# Altium PCB MiniRacer_V2.PcbDoc
Units mm, origin at the board's own origin, x right, y up, seen from the top; angles counter-clockwise.
Board outline 38.35 x 46.48 mm, 2 copper layers (Top Layer, Bottom Layer); 64 components, 63 nets, 247 pads, 101 vias.
Unrouted connection lines stored in the file: 1.
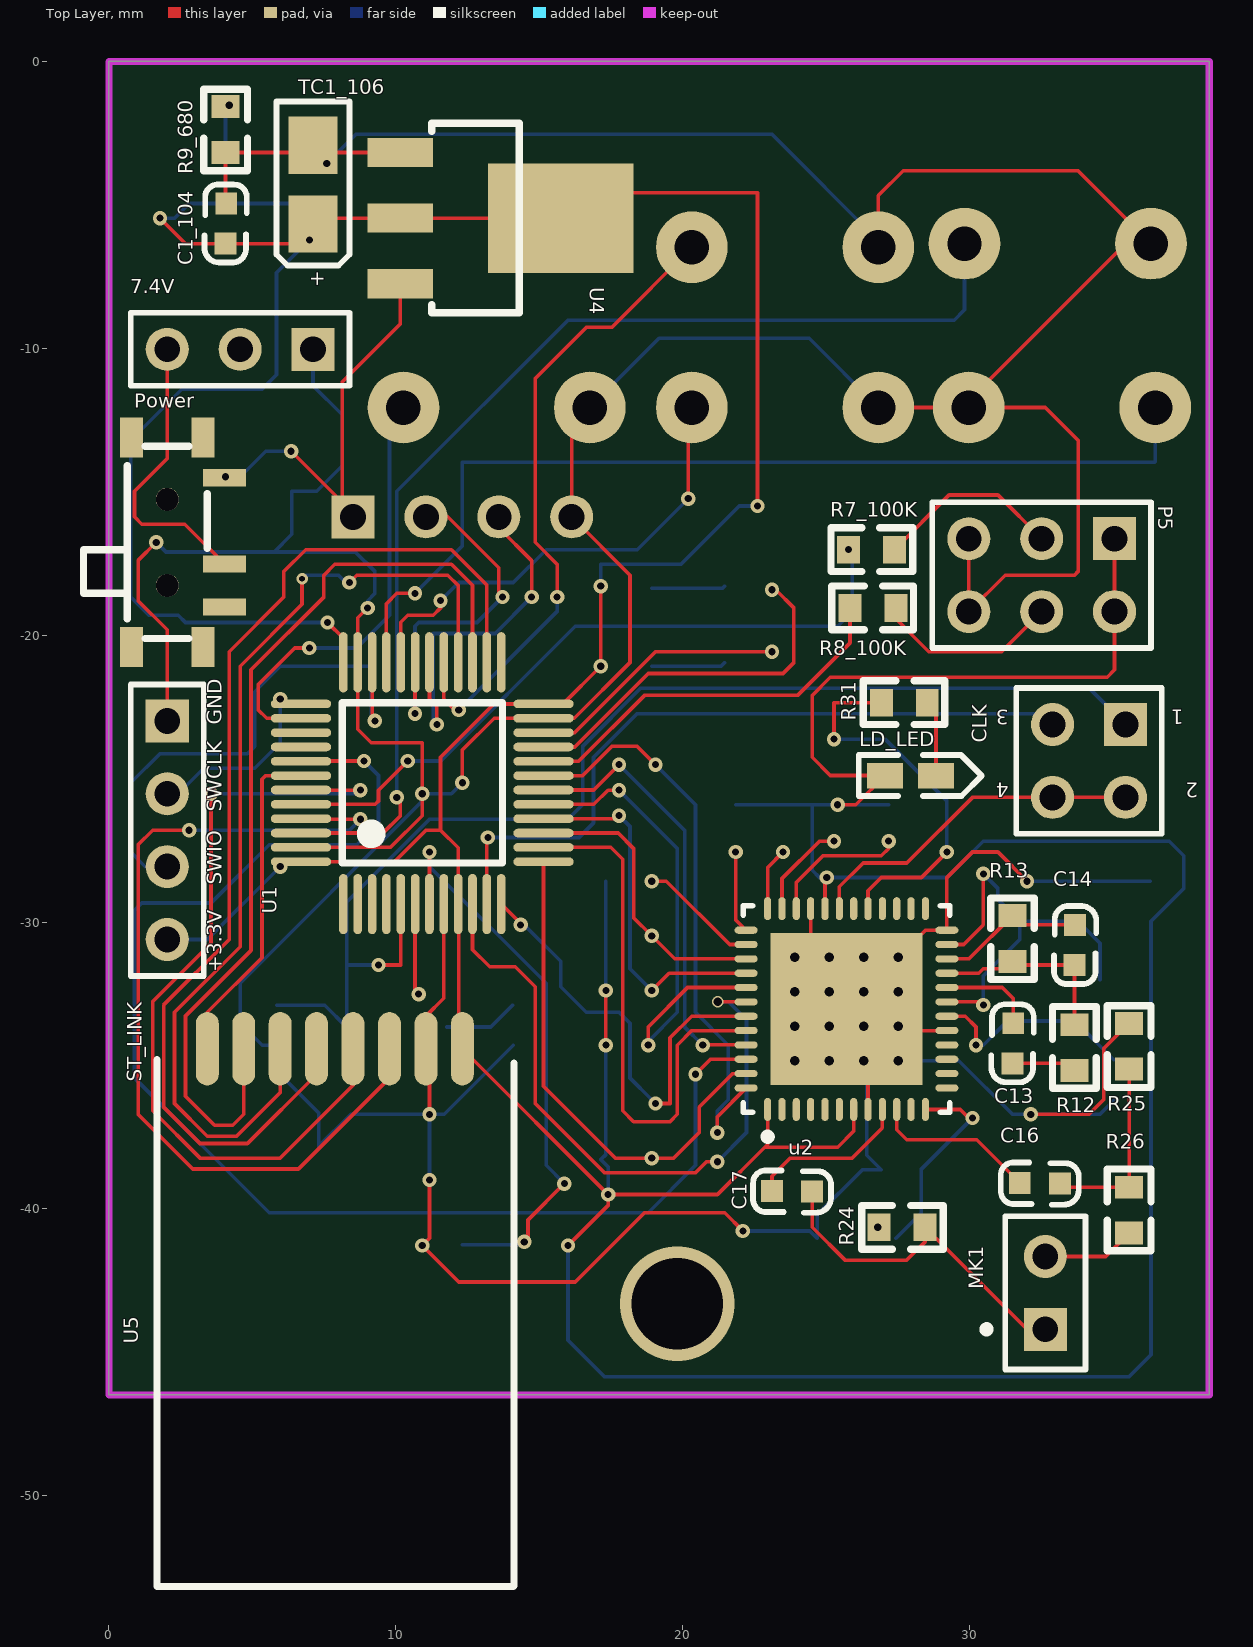
[diagram p0: Top Layer view]
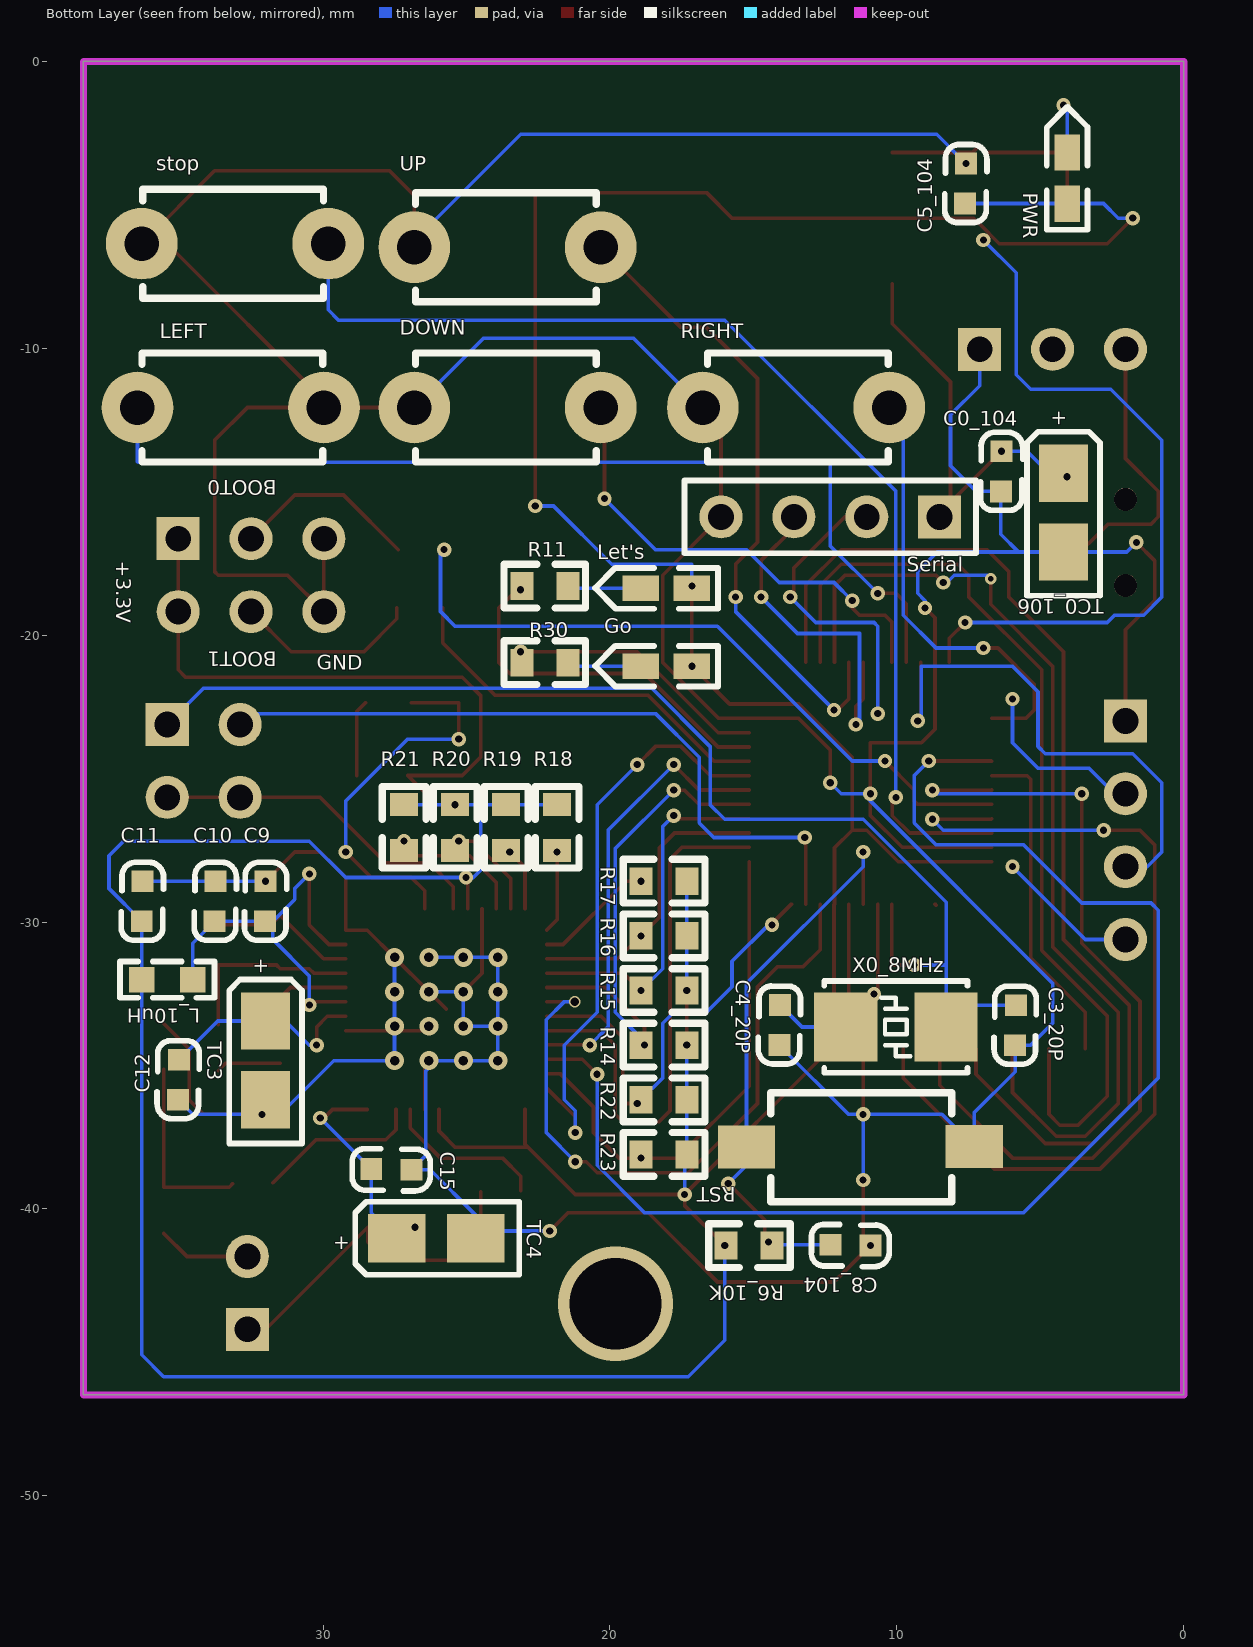
[diagram p1: Bottom Layer view, seen from below]

## Layer stack, top to bottom
Top Solder: solder mask 0.0102, Solder Resist, Dk 3.5
Top Layer: signal copper 0.0356
Dielectric 1: dielectric 0.32, FR-4, Dk 4.8
Bottom Layer: signal copper 0.0356
Bottom Solder: solder mask 0.0102, Solder Resist, Dk 3.5

## Board outline
0,-46.482 0,0 38.354,0 38.354,-11.049 38.354,-46.482

## Design rules (kind name [scope] priority, off if disabled: settings)
Clearance [All] p1: gap=0 ignorepadtopadclearanceinfootprint=TRUE
HoleToHoleClearance [All] p1: gap=0 allowstackedmicrovias=TRUE
MinimumSolderMaskSliver [All] p1: minsoldermaskwidth=0
PolygonConnect [All] p1: connectstyle=Relief reliefconductorwidth=0.254 reliefentries=4 polygonreliefangle="90 Angle" airgapwidth=0.254
RoutingVias [All] p1: holewidth=0.711 width=1.27 viastyle="Through Hole" minholewidth=0.711 minwidth=1.27 maxholewidth=0.711 maxwidth=1.27
SilkToSilkClearance [All] p1: silktosilkclearance=0
SilkToSolderMaskClearance [IsPad] p1: minsilkscreentomaskgap=0 clearancetoexposedcopper=TRUE
SolderMaskExpansion [All] p1: expansion=0.102
Width [All] p1: maxlimit=0.127 minlimit=0.127 preferedwidth=0.127
26 further rules are at their usual default settings.

## Components (designator, comment, footprint, x,y, rotation, side; value= is the part's Value field where it differs from the comment)
7.4V "Header 3" HDR1X3 7.112,-10.033 r180 top
C0_104 "104" 0603C 6.384,-14.991 r90 bottom
C1_104 "104" 0603C 4.098,-4.948 r270 top
C3_20P "20P" 0603C 5.842,-32.893 r270 bottom
C4_20P "20P" 0603C 14.063,-32.888 r270 bottom
C5_104 "104" 0603C 7.629,-4.958 r90 bottom
C8_104 "104" 0603C 12.324,-41.241 r180 bottom
C9 "104" 0603C 32.038,-29.977 r90 bottom
C10 "104" 0603C 33.791,-29.977 r90 bottom
C11 "104" 0603C 36.331,-29.977 r90 bottom
C12 "104" 0603C 35.018,-34.793 r270 bottom
C13 "104" 0603C 31.53,-33.523 r270 top
C14 "220pF" 0603C 33.646,-31.501 r90 top
C15 "104" 0603C 28.326,-38.599 r180 bottom
C16 "105" 0603C 31.745,-39.082 r0 top
C17 "105" 0603C 23.109,-39.361 r0 top
CLK "Header 2X2" HDR2X2 35.433,-23.114 r180 top
DOWN "KEY" DIP-3X6X4.3 20.32,-12.065 r0 bottom
Go "LED" LED-0603Y 17.145,-21.082 r0 bottom
L_10uH "INDUCTOR" 0603L 34.544,-32.004 r0 bottom
LD_LED "LED" LED-0603Y 27.051,-24.892 r0 top
LEFT "KEY" DIP-3X6X4.3 36.472,-12.065 r180 bottom
Let's "LED" LED-0603Y 17.145,-18.364 r0 bottom
MK1 "Mic1" PIN2 32.639,-44.196 r90 top
P5 "Pin HDR2X3" "Pin HDR2X3/2.54mm-S" 35.052,-16.637 r180 top
Power "MSK-12C01-07" MSK-12C01-07 2.032,-16.764 r270 top (schematic designator POWER)
PWR "LED" LED-0603Y 4.064,-4.953 r90 bottom
R6_10K "10k" 0603R 14.351,-41.275 r0 bottom
R7_100K "100k" 0603R 27.381,-17.018 r180 top
R8_100K "100k" 0603R 25.832,-19.05 r0 top
R9_680 "680" 0603R 4.064,-3.175 r90 top
R11 "680" 0603R 23.063,-18.288 r180 bottom
R12 "10k" 0603R 33.655,-33.579 r270 top
R13 "33k" 0603R 31.496,-31.369 r90 top
R14 "10k" 0603R 17.323,-34.29 r0 bottom
R15 "10k" 0603R 17.323,-32.385 r0 bottom
R16 "10k" 0603R 17.323,-30.48 r0 bottom
R17 "10k" 0603R 17.323,-28.575 r0 bottom
R18 "10k" 0603R 21.844,-25.908 r270 bottom
R19 "10k" 0603R 23.622,-25.908 r270 bottom
R20 "10k" 0603R 25.4,-25.908 r270 bottom
R21 "10k" 0603R 27.178,-25.908 r270 bottom
R22 "10k" 0603R 17.323,-36.195 r0 bottom
R23 "10k" 0603R 17.323,-38.1 r0 bottom
R24 "2k" 0603R 28.448,-40.64 r180 top
R25 "2k" 0603R 35.56,-35.128 r90 top
R26 "0" 0603R 35.56,-39.243 r270 top
R30 "680" 0603R 23.063,-20.955 r180 bottom
R31 "680" 0603R 26.924,-22.352 r0 top
RIGHT "KEY" DIP-3X6X4.3 16.764,-12.065 r180 bottom
RST "KEY" SMD-3X6X2.5 7.366,-37.846 r0 bottom
Serial "Pin HDR1X4" HDR1X4 8.509,-15.875 r0 bottom
ST_LINK "Pin HDR1X4" HDR1X4 2.032,-22.987 r270 top
stop "KEY" DIP-3X6X4.3 29.822,-6.35 r0 bottom
TC0_106 "106" TAJ-A/3216 4.191,-14.304 r270 bottom
TC1_106 "106" TAJ-A/3216 7.112,-5.715 r90 top
TC3 "106" TAJ-A/3216 32.004,-33.401 r270 bottom
TC4 "106" TAJ-A/3216 27.479,-41.021 r180 bottom
U1 "STM32F103C8T6" "LQFP48 7X7" 10.922,-25.146 r0 top
u2 "LD3320" QFN50P700X700-48VAN 25.71,-33.032 r90 top
U4 "AMS1117_3.3V" SOT223 10.16,-5.461 r270 top
U5 "NRF24L01" NRF24L01 12.319,-34.417 r270 top
UP "KEY" DIP-3X6X4.3 20.32,-6.477 r0 bottom
X0_8MHz "8MHz" "OSC 5032-2P" 10.033,-33.655 r180 bottom

## Footprints (in the part's own frame and the unit in brackets; to place one, negate y for a bottom-side part, rotate by r counter-clockwise, add the part's x,y. Pads: shape width x height; smd on the part's side, far side on the other; paste and mask are expansions set on the pad)
0603C [mil]
  rect 30x30 smd: 1(0.21,-0.35) 2(55.21,-1.35)
  silkscreen extent -26,-30 81,28, body extent -1,-15 62,16, height 12
0603L [mil] "小功率贴片电感"
  rect 35x35 smd: 1(0,0) 2(70,0)
  silkscreen extent -30,-25 100,25, body extent 4,-16 66,15, height 31
0603R [mm]
  rect 0.8x0.965 smd: 1(0,0) 2(1.6,0)
  silkscreen extent -0.64,-0.76 2.21,0.76, body extent -0.04,-0.41 1.56,0.41, height 0.45
DIP-3X6X4.3 [mm]
  round 2.5 hole 1.2: 1(0,0) 3(6.5,0)
  silkscreen extent 0.16,-1.9 6.46,1.9, body extent -0.63,-1.75 7.19,1.75, height 4.31
HDR1X3 [mm] "Connector; Header; 3 Position"
  rect 1.5x1.5 hole 0.9: 1(0,0)
  round 1.5 hole 0.9: 2(2.54,0) 3(5.08,0)
  silkscreen extent -1.27,-1.27 6.35,1.27
HDR1X4 [mm] "Connector; Header; 4 Position"
  rect 1.5x1.5 hole 0.9: 1(0,0)
  round 1.5 hole 0.9: 2(2.54,0) 3(5.08,0) 4(7.62,0)
  silkscreen extent -1.27,-1.27 8.89,1.27
HDR2X2 [mm] "Connector; Header; 2x2 Position"
  rect 1.5x1.5 hole 0.9: 1(0,0)
  round 1.5 hole 0.9: 2(0,2.54) 3(2.54,0) 4(2.54,2.54)
  silkscreen extent -1.27,-1.27 3.81,3.81
LED-0603Y [mil]
  rect 50x35 smd: A(0,0) K(70,0)
  silkscreen extent -36,-28 133,28, body extent 4,-17 66,15, height 24
"LQFP48 7X7" [mm]
  oval 0.3x2.1 smd: 1(-2.75,-4.227) 2(-2.25,-4.227) 3(-1.75,-4.227) 4(-1.25,-4.227) 5(-0.75,-4.227) 6(-0.25,-4.227) 7(0.25,-4.227) 8(0.75,-4.227) 9(1.25,-4.227) 10(1.75,-4.227) 11(2.25,-4.227) 12(2.75,-4.227) 25(2.75,4.202) 26(2.25,4.202) 27(1.75,4.202) 28(1.25,4.202) 29(0.75,4.202) 30(0.25,4.202) 31(-0.25,4.202) 32(-0.75,4.202) 33(-1.25,4.202) 34(-1.75,4.202) 35(-2.25,4.202) 36(-2.75,4.202)
  oval 2.1x0.3 smd: 13(4.227,-2.75) 14(4.227,-2.25) 15(4.227,-1.75) 16(4.227,-1.25) 17(4.227,-0.75) 18(4.227,-0.25) 19(4.227,0.25) 20(4.227,0.75) 21(4.227,1.25) 22(4.227,1.75) 23(4.227,2.25) 24(4.227,2.75) 37(-4.227,2.75) 38(-4.227,2.25) 39(-4.227,1.75) 40(-4.227,1.25) 41(-4.227,0.75) 42(-4.227,0.25) 43(-4.227,-0.25) 44(-4.227,-0.75) 45(-4.227,-1.25) 46(-4.227,-1.75) 47(-4.227,-2.25) 48(-4.227,-2.75)
  silkscreen extent -2.79,-2.79 2.79,2.79, body extent -4.51,-4.5 4.5,4.5, height 1.45
MSK-12C01-07 [mm]
  rect 1.4x0.8 smd: 0(-3.65,-1.25) 0(-3.65,1.25) 0(3.65,-1.25) 0(3.65,1.25)
  rect 0.6x1.5 smd: 1(2.25,1.996) 2(0.75,1.996) 3(-2.25,1.996)
  round 0.8 hole 0.8: " "(-1.5,0) " "(1.5,0)
  silkscreen extent -3.35,-2.92 3.35,1.4, body extent -3.92,-2.89 3.92,2.41, height 1.5
NRF24L01 [mm]
  oval 2.56x0.8 smd: 1(0,0) 2(0,-1.27) 3(0,-2.54) 4(0,-3.81) 5(0,-5.08) 6(0,-6.35) 7(0,-7.62) 8(0,-8.89)
  silkscreen extent 0.38,-10.64 18.75,1.8, body extent 0.5,-10.4 18.5,1.6, height 1
"OSC 5032-2P" [mm]
  rect 2.2x2.4 smd: 1(-1.75,0) 2(1.75,0)
  silkscreen extent -2.5,-1.6 2.5,1.6, body extent -2.5,-1.52 2.5,1.68, height 0.86
PIN2 [mm] "Photosensitive Diode; 2 Leads"
  rect 1.5x1.5 hole 0.9: 1(0,0)
  round 1.5 hole 0.9: 2(2.54,0)
  silkscreen extent -1.4,-1.4 3.94,2.17
"Pin HDR2X3/2.54mm-S" [mm] "Connector; Header; 3x2 Position"
  rect 1.5x1.5 hole 0.9: 1(0,0)
  round 1.5 hole 0.9: 2(0,2.54) 3(2.54,0) 4(2.54,2.54) 5(5.08,0) 6(5.08,2.54)
  silkscreen extent -1.27,-1.27 6.35,3.81, body extent -1.27,-1.27 6.35,3.81, height 7.58
QFN50P700X700-48VAN [mm] "QFN, 48-Leads, Body 7x7mm, Pitch 0.5mm, IPC Medium Density"
  oval 0.8x0.25 smd: 1(-3.5,2.75) 2(-3.5,2.25) 3(-3.5,1.75) 4(-3.5,1.25) 5(-3.5,0.75) 6(-3.5,0.25) 7(-3.5,-0.25) 8(-3.5,-0.75) 9(-3.5,-1.25) 10(-3.5,-1.75) 11(-3.5,-2.25) 12(-3.5,-2.75) 25(3.5,-2.75) 26(3.5,-2.25) 27(3.5,-1.75) 28(3.5,-1.25) 29(3.5,-0.75) 30(3.5,-0.25) 31(3.5,0.25) 32(3.5,0.75) 33(3.5,1.25) 34(3.5,1.75) 35(3.5,2.25) 36(3.5,2.75)
  oval 0.25x0.8 smd: 13(-2.75,-3.5) 14(-2.25,-3.5) 15(-1.75,-3.5) 16(-1.25,-3.5) 17(-0.75,-3.5) 18(-0.25,-3.5) 19(0.25,-3.5) 20(0.75,-3.5) 21(1.25,-3.5) 22(1.75,-3.5) 23(2.25,-3.5) 24(2.75,-3.5) 37(2.75,3.5) 38(2.25,3.5) 39(1.75,3.5) 40(1.25,3.5) 41(0.75,3.5) 42(0.25,3.5) 43(-0.25,3.5) 44(-0.75,3.5) 45(-1.25,3.5) 46(-1.75,3.5) 47(-2.25,3.5) 48(-2.75,3.5)
  rect 5.3x5.3 smd: 49(0,0)
  silkscreen extent -4.57,-3.6 3.6,3.6, body extent -3.57,-3.57 3.57,3.57, height 1
SMD-3X6X2.5 [mm]
  rect 2x1.5 smd: 1(-0.059,-0.02) 3(7.874,0)
  silkscreen extent 0.73,-1.9 7.03,1.9, body extent -0.19,-1.78 7.81,1.72, height 2.59
SOT223 [mil]
  rect 40x90 smd: 1(-90,0) 2(0,0) 3(90,0)
  rect 150x200 smd: 2(0,220)
  silkscreen extent -130,43 130,163, body extent -130,-30 126,246, height 65
TAJ-A/3216 [mm]
  rect 2x1.7 smd: 1(0.047,0) 2(2.794,0)
  silkscreen extent -1.4,-1.27 4.32,1.27, body extent -0.2,-0.8 3,0.8, height 1.6

## Part data
7.4V: "Header, 3-Pin", LatestRevisionDate=17-Jul-2002, LatestRevisionNote="Re-released for DXP Platform.", Publisher="Altium Limited"
C0_104 C1_104 C3_20P C4_20P C5_104 C8_104 C9 C10 C11 C12 C13 C14 C15 C16 C17: library part CAP, "无极性电容"
CLK: "Header, 2-Pin, Dual row", LatestRevisionDate=17-Jul-2002, LatestRevisionNote="Re-released for DXP Platform.", Publisher="Altium Limited"
MK1: "Microphone", LatestRevisionDate=17-Jul-2002, LatestRevisionNote="Re-released for DXP Platform.", PackageReference=PIN2, Published=24-Mar-1999, Publisher="Altium Limited"
R6_10K R7_100K R8_100K R9_680 R11 R12 R13 R14 R15 R16 R17 R18 R19 R20 R21 R22 R23 R24 R25 R26 R30 R31: library part RES
Serial ST_LINK: library part "Header 4", "Header, 4-Pin", LatestRevisionDate=17-Jul-2002, LatestRevisionNote="Re-released for DXP Platform.", Publisher="Altium Limited"
TC0_106 TC1_106 TC3 TC4: library part TCAP, "钽电容"
U4: library part AMS1117, "三端稳压芯片"
X0_8MHz: library part XTAL-2P, "2脚无源脚晶振"

## Via types
v1: diameter 0.5, hole 0.25, Top Layer to Bottom Layer, 82 vias
v2: diameter 0.66, hole 0.33, Top Layer to Bottom Layer, tented top, 16 vias
v3: diameter 0.4, hole 0.2, Top Layer to Bottom Layer, 1 vias
v4: diameter 0.4, hole 0.3, Top Layer to Bottom Layer, 1 vias
v5: diameter 4, hole 3.2, Top Layer to Bottom Layer, 1 vias

## Nets (pads, with @x,y where several pads share a name; then routed paths per layer and width w, separated by ;. In a path a pad name is that pad's centre, name@x,y a point inside that pad or via, vN(x,y) a via of type N, cw(c..) or ccw(c..) an arc to the next point about the centre after c; other vN are vias at no path point)
+3.3V: C1_104.2 C5_104.1 C11.1 Go.A L_10uH.2 LD_LED.A Let's.A P5.1 P5.2 PWR.A R6_10K.2 R14.1 R15.1 R16.1 R17.1 R18.1 R19.1 R20.1 R21.1 R22.1 R23.1 ST_LINK.4 TC1_106.1 U1.9 U1.24 U1.36 U1.48 u2.1 u2.7 u2.32 U4.2 U5.1 | length 221.4
  Top Layer w0.127: v1(1.778,-5.461) 2.667,-6.35 C1_104.2 6.43,-6.35 TC1_106.1 7.319,-5.461 10.16,-5.461 15.748,-5.461 16.637,-4.572 22.606,-4.572 v1(22.606,-15.494) ; U1.48 9.95,-27.896 11.049,-26.797 11.557,-26.797 ; v1(7.62,-19.558) 8.172,-20.11 U1.36 ; v1(16.002,-41.275) 17.399,-39.878 v1(17.399,-39.497) ; v1(17.145,-18.288) v1(17.145,-21.082) 15.831,-22.396 U1.24 13.418,-22.396 11.557,-24.257 11.557,-26.797 ; v1(17.323,-34.29) v1(17.323,-32.385) ; u2.1 22.96,-37.746 22.86,-37.846 ; u2.32 24.96,-28.634 v1@25.019,-28.575 ; v1(25.4,-25.908) 26.035,-25.908 LD_LED.A 25.146,-24.892 24.511,-24.257 24.511,-22.098 25.146,-21.463 34.798,-21.463 35.052,-21.209 P5.2 P5.1 ; u2.7 25.96,-37.286 25.4,-37.846 22.86,-37.846 ; 11.557,-26.797 12.172,-27.412 U1.9 12.192,-29.393 12.192,-34.29 U5.1 v1(17.399,-39.497) ; v1(17.399,-39.497) 21.209,-39.497 22.86,-37.846
  Bottom Layer w0.127: v1(1.778,-5.461) 2.286,-5.461 2.794,-4.953 PWR.A C5_104.1 ; ST_LINK.4 3.429,-30.607 v1(5.969,-28.067) ; v1(6.985,-6.223) 5.842,-7.366 5.842,-10.922 5.334,-11.43 2.54,-11.43 0.762,-13.208 0.762,-18.669 1.397,-19.304 2.413,-19.304 2.667,-19.558 v1(7.62,-19.558) ; v1(16.002,-41.275) 16.002,-44.577 17.272,-45.847 35.56,-45.847 36.322,-45.085 L_10uH.2 C11.1 37.465,-28.829 37.465,-27.686 36.957,-27.178 30.48,-27.178 29.21,-28.448 v1(25.019,-28.448) 24.765,-28.448 24.511,-28.194 24.511,-25.908 ; v1(17.145,-18.288) 17.145,-17.526 19.939,-17.526 21.971,-15.494 v1(22.606,-15.494) ; v1(17.323,-34.29) R22.1 R23.1 17.145,-38.278 17.399,-38.532 v1(17.399,-39.497) ; v1(17.323,-32.385) R16.1 R17.1 ; R18.1 R19.1 24.511,-25.908 ; R21.1 v1(25.4,-25.908) 24.511,-25.908
+5V: C0_104.2 Power.3 Serial.1 TC0_106.1 U4.3 | length 14.1
  Top Layer w0.127: v1(6.35,-13.589) Serial.1@8.128,-15.367 ; Serial.1 8.509,-15.748 Serial.1@8.128,-15.367 ; U4.3 10.16,-9.144 8.128,-11.176 Serial.1@8.128,-15.367
  Bottom Layer w0.127: TC0_106.1 4.699,-14.351 5.461,-13.589 v1(6.35,-13.589)
  other v1: 4.064,-14.478
BOOT0: R7_100K.2 U1.44 | length 24.4
  Top Layer w0.127: U1.44 9.283,-25.896 9.398,-25.781 9.398,-25.4 v1(10.414,-24.384)
  Bottom Layer w0.127: v1(10.414,-24.384) 11.557,-24.384 16.256,-19.685 25.4,-19.685 25.908,-19.177 25.908,-17.145 v1(25.781,-17.018)
BOOT1: R8_100K.1 U1.20 | length 13.6
  Top Layer w0.127: U1.20 16.371,-24.396 18.669,-22.098 24.003,-22.098 25.832,-20.269 R8_100K.1
GND: 7.4V.1 C0_104.1 C1_104.1 C3_20P.2 C4_20P.2 C5_104.2 C8_104.2 C9.2 C10.2 C11.2 C12.2 C15.2 DOWN.3 LEFT.3 P5.5 P5.6 R9_680.1 R25.2 RIGHT.1 RST.1 Serial.4 ST_LINK.1 stop.3 TC0_106.2 TC1_106.2 TC3.2 TC4.2 U1.8 U1.23 U1.35 U1.47 u2.8 u2.17 u2.24 u2.33 u2.49 U4.1 U5.2 UP.3 | length 253.8
  Top Layer w0.127: v1(1.651,-16.764) 1.016,-17.399 1.016,-18.796 2.032,-19.812 ST_LINK.1 ; C1_104.1 4.064,-4.928 R9_680.1 6.858,-3.175 TC1_106.2 7.366,-3.175 U4.1 ; U1.47 9.815,-27.396 10.922,-26.289 v1(10.922,-25.527) 10.922,-23.749 9.144,-23.749 8.672,-23.277 U1.35 8.672,-19.395 v1(9.017,-19.05) ; v1(11.176,-38.989) 11.176,-41.021 v1(10.922,-41.275) 12.192,-42.545 16.256,-42.545 18.669,-40.132 21.463,-40.132 v1(22.098,-40.767) ; v1(11.176,-36.703) 11.176,-34.544 U5.2 11.049,-33.274 11.672,-32.651 U1.8 ; v1(12.319,-25.146) 12.319,-24.003 13.426,-22.896 U1.23 16.22,-22.896 18.161,-20.955 18.161,-17.907 Serial.4 16.129,-12.7 RIGHT.1 ; u2.33 24.46,-31.782 v2(25.11,-32.432) ; u2.49 v2(26.31,-32.432) v2(27.51,-31.232) 28.46,-30.282 u2.24 29.21,-28.448 30.099,-27.559 30.988,-27.559 v1(32.004,-28.575) ; v2(26.31,-33.632) 26.46,-33.782 u2.17 ; u2.8 u2.49@26.46,-34.832 ; DOWN.3 LEFT.3 ; UP.3 26.82,-4.676 27.686,-3.81 33.782,-3.81 stop.3 35.433,-6.35 29.845,-11.938 LEFT.3 ; P5.5 P5.6 31.242,-17.907 33.655,-17.907 33.782,-17.78 33.782,-13.208 32.639,-12.065 LEFT.3 ; v1(32.131,-36.703) 34.163,-36.703 34.671,-36.195 34.671,-34.417 R25.2
  Bottom Layer w0.127: v1(1.651,-16.764) 1.985,-17.098 TC0_106.2 5.762,-17.098 ; 7.4V.1 7.112,-11.303 8.128,-12.319 8.128,-14.097 7.239,-14.986 C0_104.1 6.375,-16.485 5.762,-17.098 ; v1(7.595,-3.556) 8.611,-2.54 23.114,-2.54 26.82,-6.246 UP.3 ; v1(9.017,-19.05) 9.017,-18.796 9.271,-18.542 9.271,-17.78 8.589,-17.098 5.762,-17.098 ; v1(11.176,-38.989) v1(11.176,-36.703) ; v1(12.319,-25.146) 11.938,-25.527 v1(10.922,-25.527) 10.922,-25.781 4.572,-32.131 4.572,-33.528 5.339,-34.295 C3_20P.2 5.876,-35.213 7.307,-36.644 RST.1 8.43,-36.703 v1(11.176,-36.703) ; C4_20P.2 11.684,-36.703 v1(11.176,-36.703) ; RIGHT.1 19.177,-9.652 24.407,-9.652 DOWN.3 ; v1(22.098,-40.767) 24.431,-40.767 TC4.2 24.685,-40.212 26.264,-38.633 C15.2 26.416,-38.125 26.416,-35.179 26.31,-35.073 v2(26.31,-34.832) v2(25.11,-34.832) v2(23.91,-34.832) v2(23.91,-33.632) ; v2(26.31,-32.432) v2(25.11,-32.432) v2(25.11,-33.632) v2(23.91,-33.632) ; v2(26.31,-31.232) v2(25.11,-31.232) v2(23.91,-31.232) v2(23.91,-32.432) v2(23.91,-33.632) ; v2(27.51,-31.232) v2(27.51,-32.432) v2(27.51,-33.632) v2(27.51,-34.832) 29.625,-34.832 31.496,-36.703 v1(32.131,-36.703) 34.544,-36.703 C12.2 ; v1(32.004,-28.575) C10.2 C11.2
I/O_CE: U1.45 U5.3 | length 31.5
  Top Layer w0.127: v1(2.794,-26.797) 1.524,-26.797 1.016,-27.305 1.016,-36.703 2.921,-38.608 6.604,-38.608 9.779,-35.433 U5.3 ; U1.45 6.715,-26.416 v1(8.763,-26.416)
  Bottom Layer w0.127: v1(2.794,-26.797) 8.382,-26.797 v1(8.763,-26.416)
I/O_CSN: U1.43 U5.4 | length 29.2
  Top Layer w0.127: v1(3.556,-25.527) 3.556,-30.734 1.524,-32.766 1.524,-36.576 3.175,-38.227 5.969,-38.227 8.509,-35.687 U5.4 ; U1.43 6.699,-25.4 v1(8.763,-25.4)
  Bottom Layer w0.127: v1(3.556,-25.527) 8.636,-25.527 v1(8.763,-25.4)
I/O_IRQ: U1.42 U5.8 | length 11.6
  Top Layer w0.127: U5.8 3.429,-33.147 5.334,-31.242 5.334,-25.019 5.457,-24.896 U1.42
I/O_MISO: U1.27 U5.7 | length 33.4
  Top Layer w0.127: U5.7 4.699,-36.703 4.318,-37.084 3.683,-37.084 2.667,-36.068 2.667,-33.274 4.953,-30.988 4.953,-21.209 7.493,-18.669 7.493,-17.907 7.874,-17.526 11.938,-17.526 12.672,-18.26 U1.27
I/O_MOSI: U1.28 U5.6 | length 35.2
  Top Layer w0.127: U5.6 5.969,-35.941 4.445,-37.465 3.429,-37.465 2.286,-36.322 2.286,-33.147 4.572,-30.861 4.572,-21.082 6.731,-18.923 v3(6.731,-18.034) ; v1(8.382,-18.161) 8.636,-17.907 11.811,-17.907 12.172,-18.268 U1.28
  Bottom Layer w0.127: v3(6.731,-18.034) 6.858,-17.907 8.001,-17.907 8.382,-18.288 v1(8.382,-18.161)
I/O_SCK: U1.26 U5.5 | length 38.7
  Top Layer w0.127: U5.5 7.239,-35.306 4.826,-37.719 3.175,-37.719 1.905,-36.449 1.905,-32.893 4.191,-30.607 4.191,-20.574 6.096,-18.669 6.096,-17.78 6.858,-17.018 11.938,-17.018 13.172,-18.252 U1.26
ICR_MICN: C16.1 u2.10 | length 5.8
  Top Layer w0.127: u2.10 27.46,-37.239 27.813,-37.592 30.251,-37.592 C16.1
ICR_MICP: C17.1 u2.9 | length 5.7
  Top Layer w0.127: C17.1 23.114,-38.862 23.749,-38.227 25.908,-38.227 26.96,-37.175 u2.9
LD_A0: U1.14 u2.44 | length 18.9
  Top Layer w0.127: U1.14 17.49,-27.396 17.907,-27.813 17.907,-36.576 18.288,-36.957 19.558,-36.957 19.812,-36.703 19.812,-34.29 20.32,-33.782 u2.44
LD_Clk: CLK.2 CLK.4 u2.31 | length 12
  Top Layer w0.127: u2.31 25.46,-28.769 26.289,-27.94 27.813,-27.94 30.099,-25.654 CLK.4 CLK.2
LD_CS: R22.2 U1.12 u2.43 | length 15.4
  Top Layer w0.127: U1.12 14.351,-30.052 v1(14.351,-30.099) ; v1(19.05,-36.322) 19.558,-36.322 19.558,-34.036 20.312,-33.282 u2.43
  Bottom Layer w0.127: v1@14.478,-30.099 15.748,-31.369 15.748,-32.258 16.637,-33.147 17.78,-33.147 18.161,-33.528 18.161,-35.433 R22.2
LD_irq: U1.19 u2.48 | length 20.6
  Top Layer w0.127: U1.19 16.506,-24.896 17.526,-23.876 18.415,-23.876 v1(19.05,-24.511) ; v1(21.209,-37.338) 21.209,-36.783 u2.48
  Bottom Layer w0.127: v1(19.05,-24.511) 20.447,-25.908 20.447,-33.147 21.59,-34.29 21.59,-36.195 21.209,-36.576 v1(21.209,-37.338)
LD_MD: U1.41 u2.46 | length 47.5
  Top Layer w0.127: U1.41 6.707,-24.384 v1(8.89,-24.384) ; v1(20.447,-35.306) 20.971,-34.782 u2.46
  Bottom Layer w0.127: v1(8.89,-24.384) 9.398,-24.892 9.398,-26.543 8.636,-27.305 5.588,-27.305 3.556,-29.337 1.143,-29.337 0.889,-29.591 0.889,-35.433 5.588,-40.132 18.796,-40.132 20.447,-38.481 v1(20.447,-35.306)
LD_P0: R14.2 U1.17 u2.41 | length 17.6
  Top Layer w0.127: U1.17 16.903,-25.896 17.399,-25.4 v1(17.78,-25.4) ; v1(18.796,-34.29) 18.796,-33.655 20.169,-32.282 u2.41
  Bottom Layer w0.127: v1(17.78,-25.4) 19.812,-27.432 19.812,-33.147 18.796,-34.163 v1(18.796,-34.29)
LD_P1: R15.2 U1.16 u2.40 | length 12.8
  Top Layer w0.127: U1.16 17.673,-26.396 v1(17.78,-26.289) ; v1(18.923,-32.385) 19.526,-31.782 u2.40
  Bottom Layer w0.127: v1(17.78,-26.289) 18.161,-26.67 18.161,-31.623 v1(18.923,-32.385)
LD_P2: R16.2 U1.15 u2.39 | length 10.3
  Top Layer w0.127: U1.15 17.752,-26.896 18.288,-27.432 18.288,-29.845 v1(18.923,-30.48) 19.725,-31.282 u2.39
LD_P3: R17.2 u2.38 | length 4.2
  Top Layer w0.127: v1(18.923,-28.575) 19.431,-28.575 21.638,-30.782 u2.38
LD_P4: R18.2 u2.37 | length 2.9
  Top Layer w0.127: v1(21.844,-27.559) 21.844,-29.916 u2.37
LD_P5: R19.2 u2.36 | length 2.2
  Top Layer w0.127: u2.36 22.96,-28.094 v1(23.495,-27.559)
LD_P6: R20.2 u2.35 | length 3.4
  Top Layer w0.127: u2.35 23.46,-28.483 24.765,-27.178 v1(25.273,-27.178)
LD_P7: R21.2 u2.34 | length 4.9
  Top Layer w0.127: u2.34 23.96,-28.618 24.892,-27.686 26.924,-27.686 27.178,-27.432 v1(27.178,-27.178)
LD_Rd: U1.18 u2.45 | length 15.5
  Top Layer w0.127: U1.18 16.895,-25.396 v1(17.78,-24.511) ; v1(20.701,-34.29) 20.709,-34.282 u2.45
  Bottom Layer w0.127: v1(17.78,-24.511) 20.066,-26.797 20.066,-33.655 v1(20.701,-34.29)
LD_RST: R23.2 U1.13 u2.47 | length 17.7
  Top Layer w0.127: U1.13 15.149,-35.723 17.653,-38.227 v1(18.923,-38.227) 19.685,-38.227 20.574,-37.338 20.574,-36.449 21.741,-35.282 u2.47
LD_wr: U1.10 u2.42 | length 23.5
  Top Layer w0.127: U1.10 12.672,-30.96 13.272,-31.56 14.161,-31.56 14.859,-32.258 14.859,-36.322 17.272,-38.735 20.447,-38.735 20.828,-38.354 v1(21.209,-38.354) ; v4(21.225,-32.782) u2.42
  Bottom Layer w0.127: v1(21.209,-38.354) 22.225,-37.338 22.225,-33.401 21.606,-32.782 v4(21.225,-32.782)
MBS: C15.1 R24.2 TC4.1 u2.12 | length 6.9
  Top Layer w0.127: u2.12 29.674,-36.532 v1@29.972,-36.83
  Bottom Layer w0.127: TC4.1 28.321,-40.132 C15.1 v1(30.099,-36.83)
  other v1: 26.797,-40.64
MICN: MK1.2 R26.2 | length 3.3
  Top Layer w0.127: MK1.2 34.747,-41.656 R26.2
MICP: C17.2 MK1.1 R24.1 | length 12.1
  Top Layer w0.127: C17.2 24.511,-40.64 25.654,-41.783 27.813,-41.783 28.448,-41.148 R24.1 32.004,-44.196 MK1.1
Net7.4V_3: 7.4V.3 Power.2 | length 10.1
  Top Layer w0.127: 7.4V.3 2.032,-13.843 0.889,-14.986 0.889,-15.875 1.143,-16.129 2.643,-16.129 Power.2
NetC3_20P_1: C3_20P.1 CLK.1 U1.5 X0_8MHz.2 | length 43.1
  Top Layer w0.127: v1(9.398,-31.496) 10.172,-31.496 U1.5
  Bottom Layer w0.127: C3_20P.1 7.526,-32.898 X0_8MHz.2 8.283,-31.496 ; v1(9.398,-31.496) 8.283,-31.496 ; CLK.1 34.163,-21.844 18.542,-21.844 16.51,-23.876 16.51,-25.908 16.002,-26.416 11.176,-26.416 8.283,-29.309 8.283,-31.496
NetC4_20P_1: C4_20P.1 U1.6 X0_8MHz.1 | length 5.8
  Top Layer w0.127: U1.6 10.668,-29.377 10.668,-32.385 v1(10.795,-32.512)
  Bottom Layer w0.127: X0_8MHz.1 13.31,-33.655 C4_20P.1
NetC9_1: C9.1 C10.1 L_10uH.1 u2.19 u2.23 | length 14.2
  Top Layer w0.127: u2.19 v1@30.337,-32.782 ; u2.23 29.797,-30.782 30.48,-30.099 v1(30.48,-28.321)
  Bottom Layer w0.127: v1(30.48,-32.893) 30.48,-31.877 31.75,-30.607 31.75,-29.972 30.988,-29.21 30.988,-28.829 v1(30.48,-28.321) ; C9.1 C10.1 34.544,-30.734 L_10uH.1
NetC12_1: C12.1 TC3.1 u2.18 | length 7.5
  Top Layer w0.127: u2.18 29.853,-33.282 30.226,-33.655 v1(30.226,-34.29)
  Bottom Layer w0.127: v1(30.226,-34.29) 30.48,-34.29 31.322,-33.448 TC3.1 33.677,-33.448 C12.1
NetC13_1: C13.1 u2.20 | length 3.3
  Top Layer w0.127: u2.20 31.139,-32.282 31.521,-32.664 C13.1
NetC13_2: C13.2 R12.2 | length 2.3
  Top Layer w0.127: C13.2 33.401,-34.925 R12.2
NetC14_1: C14.1 R12.1 R13.1 u2.21 | length 6.6
  Top Layer w0.127: u2.21 30.321,-31.782 30.48,-31.623 31.496,-31.623 31.623,-31.496 C14.1 R12.1
NetC14_2: C14.2 R13.2 u2.22 | length 5.2
  Top Layer w0.127: u2.22 29.983,-31.282 R13.2 31.826,-30.099 C14.2
NetC16_2: C16.2 R25.1 R26.1 | length 6.6
  Top Layer w0.127: C16.2 33.274,-39.243 R26.1 R25.1
NetCLK_3: CLK.3 U1.11 | length 25.3
  Top Layer w0.127: U1.11 13.172,-27.087 v1(13.208,-27.051)
  Bottom Layer w0.127: v1(13.208,-27.051) 16.383,-27.051 16.891,-26.543 16.891,-24.257 18.415,-22.733 32.512,-22.733 CLK.3
NetGo_K: Go.K R30.2 | length 2.6
  Bottom Layer w0.127: Go.K 21.336,-21.082 R30.2
NetLD_LED_K: LD_LED.K R31.2 | length 2.7
  Top Layer w0.127: R31.2 28.829,-22.657 LD_LED.K
NetLet's_K: Let's.K R11.2 | length 2.6
  Bottom Layer w0.127: Let's.K 21.387,-18.364 R11.2
NetP5_3: P5.3 R7_100K.1 | length 6.6
  Top Layer w0.127: R7_100K.1 29.286,-15.113 30.988,-15.113 P5.3
NetP5_4: P5.4 R8_100K.2 | length 6.5
  Top Layer w0.127: R8_100K.2 27.432,-19.431 28.575,-20.574 31.115,-20.574 P5.4
NetPWR_K: PWR.K R9_680.2 | length 1.7
  Bottom Layer w0.127: PWR.K 4.064,-1.651 v1(4.191,-1.524)
NetR31_1: R31.1 u2.29 | length 13.5
  Top Layer w0.127: v1(25.273,-23.622) 25.273,-22.352 R31.1 ; u2.29 26.46,-28.912 26.924,-28.448 28.321,-28.448 v1(29.21,-27.559)
  Bottom Layer w0.127: v1(25.273,-23.622) 27.051,-23.622 29.21,-25.781 v1(29.21,-27.559)
NRST: C8_104.1 R6_10K.1 RST.3 U1.7 | length 19.8
  Top Layer w0.127: U1.7 v1@11.172,-27.563 ; v1@14.605,-41.021 14.605,-40.386 v1(15.875,-39.116)
  Bottom Layer w0.127: v1(11.176,-27.559) 11.176,-28.067 15.24,-32.131 RST.3 15.24,-38.481 v1(15.875,-39.116) ; C8_104.1 14.326,-41.25 R6_10K.1
  other v1: 14.478,-41.148
PA9/TX: Serial.3 U1.30 | length 12.7
  Top Layer w0.127: U1.30 11.172,-22.221 11.43,-22.479 v1(11.43,-23.114) ; Serial.3 13.589,-16.256 14.732,-17.399 v1(14.732,-18.669)
  Bottom Layer w0.127: v1(11.43,-23.114) 11.303,-22.987 11.303,-19.939 13.462,-19.939 v1(14.732,-18.669)
PA10/RX: Serial.2 U1.31 | length 12.6
  Top Layer w0.127: v1(10.668,-22.733) 10.668,-20.948 U1.31 ; Serial.2 11.811,-15.875 13.589,-17.653 v1@13.589,-18.669
  Bottom Layer w0.127: v1(10.668,-22.733) 10.668,-19.685 10.795,-19.558 12.827,-19.558 v1(13.716,-18.669)
PB10: R11.1 U1.21 | length 12.9
  Top Layer w0.127: U1.21 16.236,-23.896 18.796,-21.336 23.495,-21.336 23.876,-20.955 23.876,-19.05 23.241,-18.415 v1(23.114,-18.415)
PB11: R30.1 U1.22 | length 9.1
  Top Layer w0.127: U1.22 16.228,-23.396 19.05,-20.574 v1(23.114,-20.574)
PC13: U1.2 | length 0.1
  Top Layer w0.127: U1.2@8.636,-29.409 U1.2
S_DOWN: DOWN.1 U1.32 | length 16.3
  Top Layer w0.127: U1.32 10.172,-19.546 10.414,-19.304 11.303,-19.304 11.557,-19.05 ; v1(20.193,-15.24) 20.193,-12.192 DOWN.1
  Bottom Layer w0.127: v1(11.557,-18.796) 12.192,-18.161 14.097,-18.161 15.24,-17.018 18.415,-17.018 v1(20.193,-15.24)
S_LEFT: LEFT.1 U1.33 | length 34.5
  Top Layer w0.127: U1.33 9.672,-18.903 10.033,-18.542 v1(10.668,-18.542)
  Bottom Layer w0.127: v1(10.668,-18.542) 12.319,-16.891 12.319,-13.97 36.449,-13.97 36.472,-13.947 LEFT.1
S_RIGHT: RIGHT.3 U1.38 | length 15.5
  Top Layer w0.127: U1.38 5.497,-22.896 5.207,-22.606 5.207,-21.717 6.477,-20.447 v1(6.985,-20.447)
  Bottom Layer w0.127: v1(6.985,-20.447) 8.636,-20.447 9.779,-19.304 9.779,-12.55 RIGHT.3
S_STOP: stop.1 U1.46 | length 39.7
  Top Layer w0.127: U1.46 9.553,-26.896 10.16,-26.289 v1@10.16,-25.654
  Bottom Layer w0.127: v1(10.033,-25.654) 10.033,-14.986 16.002,-9.017 29.464,-9.017 29.822,-8.659 stop.1
S_UP: U1.29 UP.1 | length 22.6
  Top Layer w0.127: U1.29 11.672,-22.213 12.065,-22.606 v1(12.192,-22.606) ; v1(15.621,-18.669) 15.621,-17.526 14.859,-16.764 14.859,-11.049 16.637,-9.271 17.526,-9.271 UP.1
  Bottom Layer w0.127: v1(12.192,-22.606) 15.621,-19.177 v1(15.621,-18.669)
SWCLK: ST_LINK.2 U1.37 | length 6.2
  Bottom Layer w0.127: ST_LINK.2 2.413,-25.527 3.302,-24.638 5.08,-24.638 5.969,-23.749 v1(5.969,-22.225)
SWIO: ST_LINK.3 U1.34 | length 19.1
  Top Layer w0.127: U1.34 9.172,-22.888 v1(9.271,-22.987)
  Bottom Layer w0.127: ST_LINK.3 1.27,-28.067 0.762,-27.559 0.762,-25.146 1.778,-24.13 4.826,-24.13 5.08,-23.876 5.08,-21.971 5.969,-21.082 9.144,-21.082 v1@9.144,-22.987
pads on no net: 7.4V.2 "Power. " Power.0 Power.1 U1.1 U1.3 U1.4 U1.25 U1.39 U1.40 u2.2 u2.3 u2.4 u2.5 u2.6 u2.11 u2.13 u2.14 u2.15 u2.16 u2.25 u2.26 u2.27 u2.28 u2.30
copper on no net:
  other v5: 19.812,-43.307

## Keep-outs
Keep-Out Layer:
  the board outline again, w0.254

## Silkscreen, mask and mechanical layers (free items; w line width, h text height)
Top Overlay:
  text "GND" at 3.937,-23.114 h0.51 r90
  text "SWCLK" at 3.937,-26.162 h0.51 r90
  text "SWIO" at 3.937,-28.702 h0.51 r90
  text "+3.3V" at 3.937,-31.75 h0.51 r90
Bottom Overlay:
  text "BOOT0" at 31.623,-14.605 h0.51 r180
  text "+3.3V" at 37.211,-17.399 h0.51 r90
  text "BOOT1" at 31.623,-20.574 h0.51 r180
  text "GND" at 30.226,-21.209 h0.51

## Text inside footprints (layer, text, board x,y; h text height)
CLK: Top Overlay "1" at 37.465,-22.606 h0.51 r180; Top Overlay "2" at 37.973,-25.146 h0.51 r180; Top Overlay "4" at 31.369,-25.146 h0.51 r180; Top Overlay "3" at 31.369,-22.606 h0.51 r180
TC0_106: Bottom Overlay "+" at 4.572,-12.145 h0.51 r90
TC1_106: Top Overlay "+" at 7.493,-7.874 h0.51 r90
TC3: Bottom Overlay "+" at 32.385,-31.242 h0.51 r90
TC4: Bottom Overlay "+" at 29.638,-41.402 h0.51